# Altium PCB 按键.PcbDoc
Units mil, origin at the board's own origin, x right, y up, seen from the top; angles counter-clockwise.
Board outline 3931.98 x 2199.7 mil, 2 copper layers (Top Layer, Bottom Layer), stack 12.249 mil thick; 50 components, 31 nets, 116 pads, 466 vias.
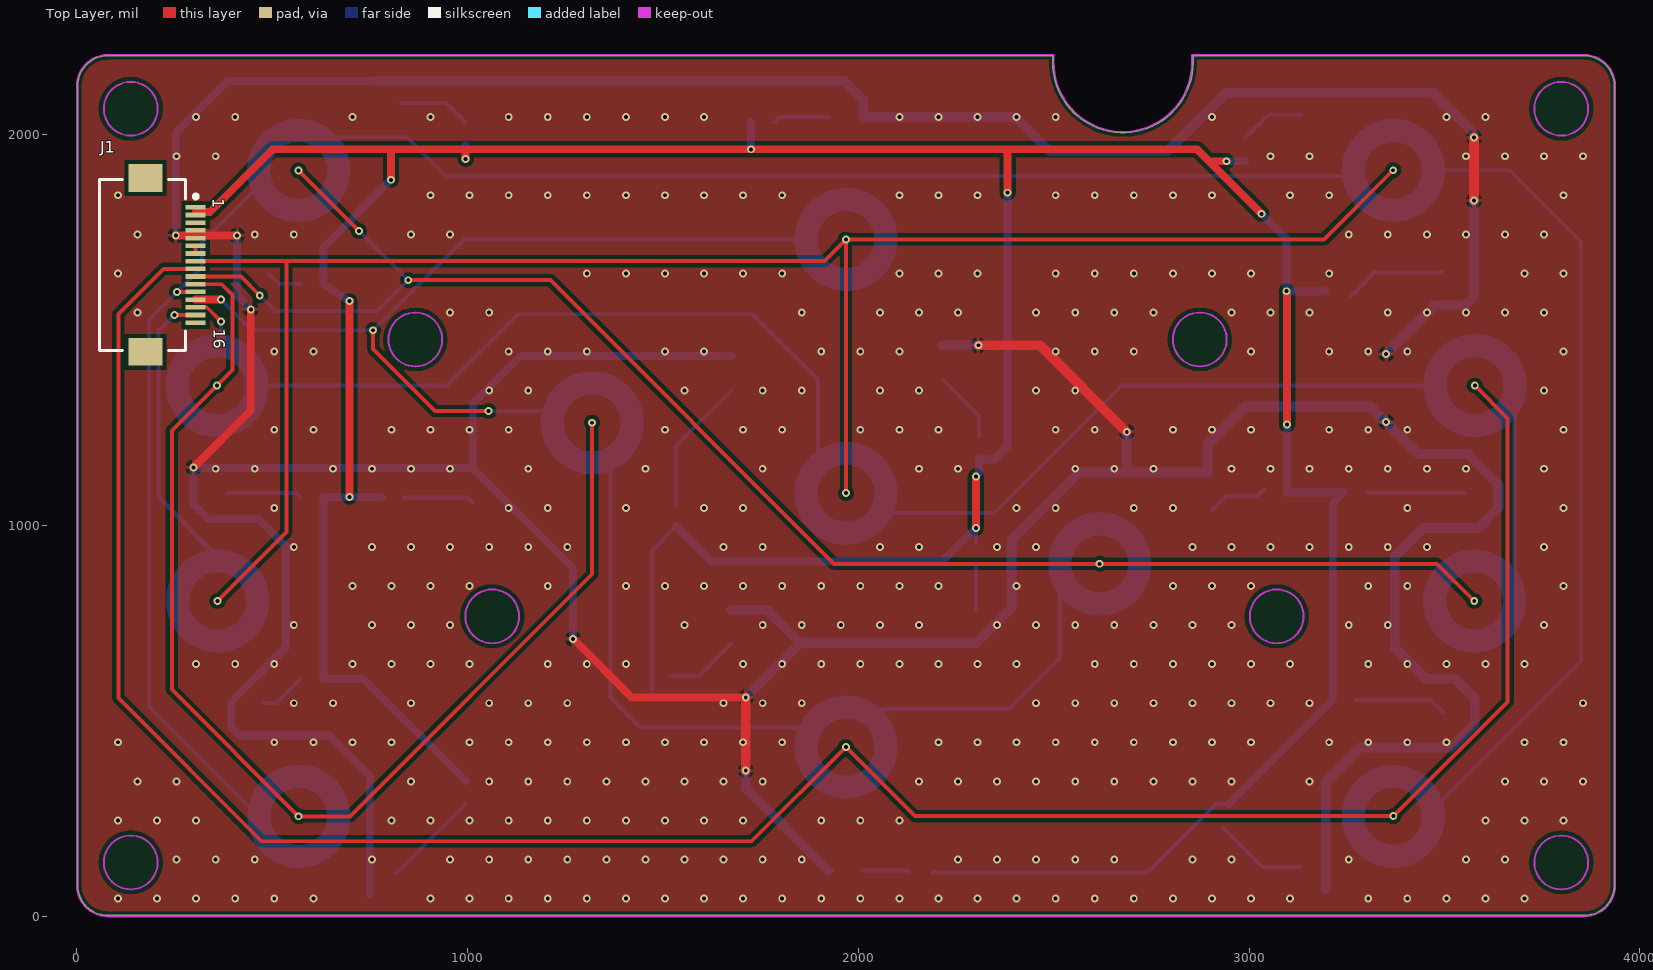
[diagram p0: Top Layer view]
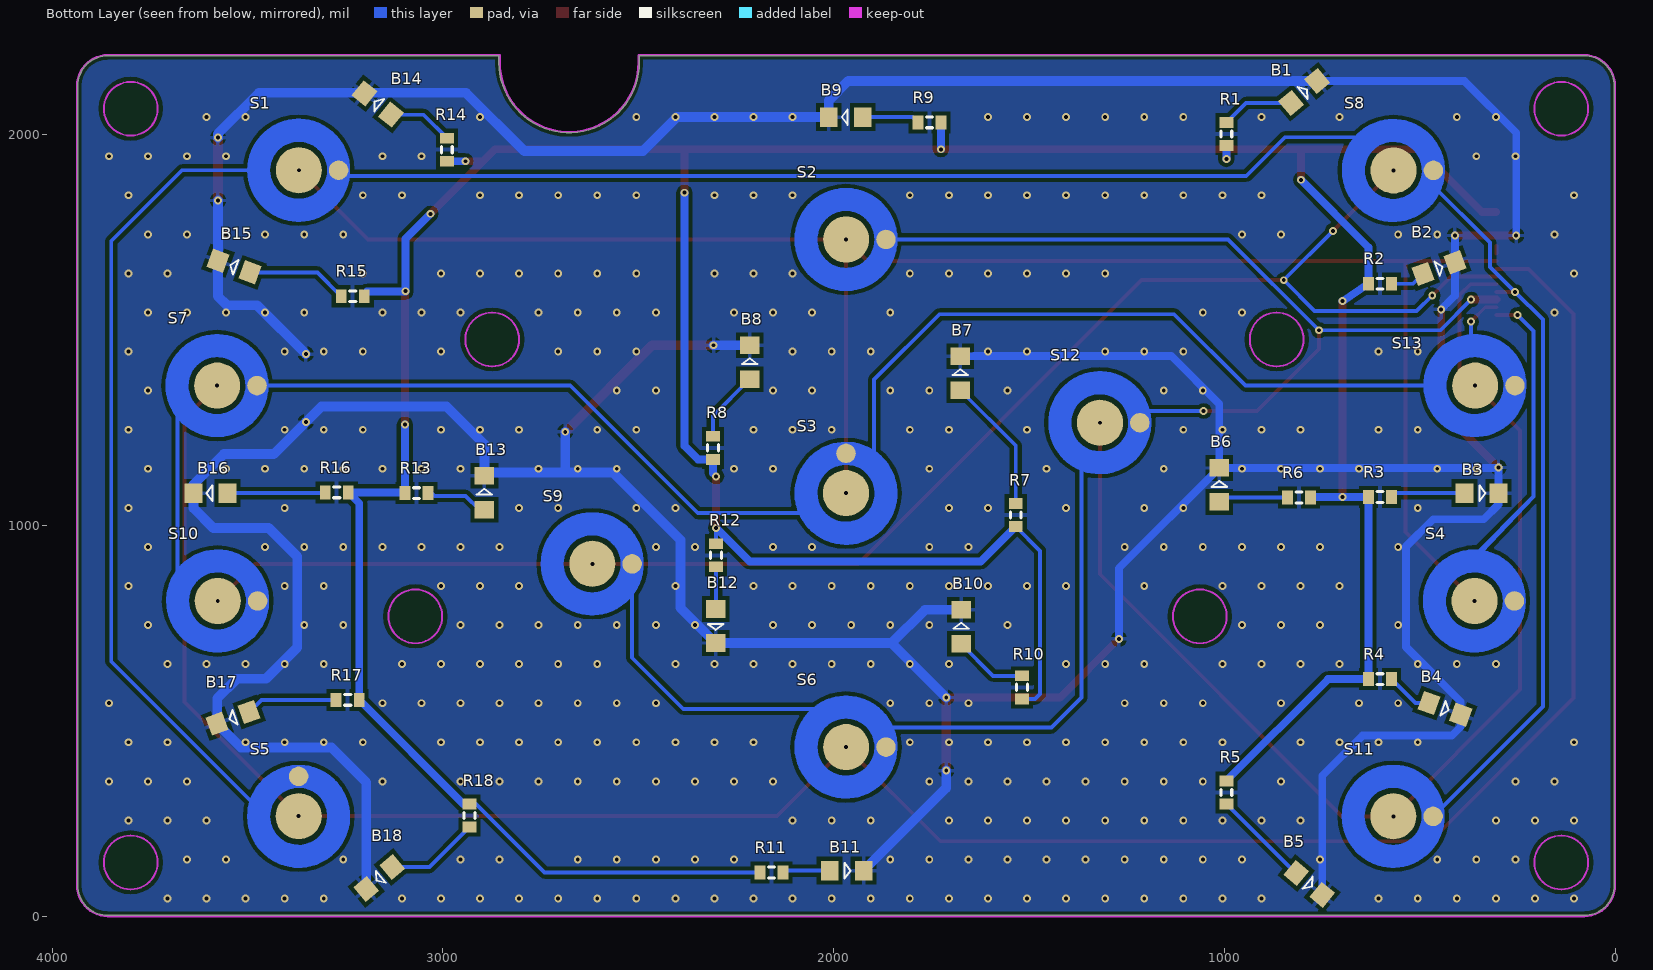
[diagram p1: Bottom Layer view, seen from below]
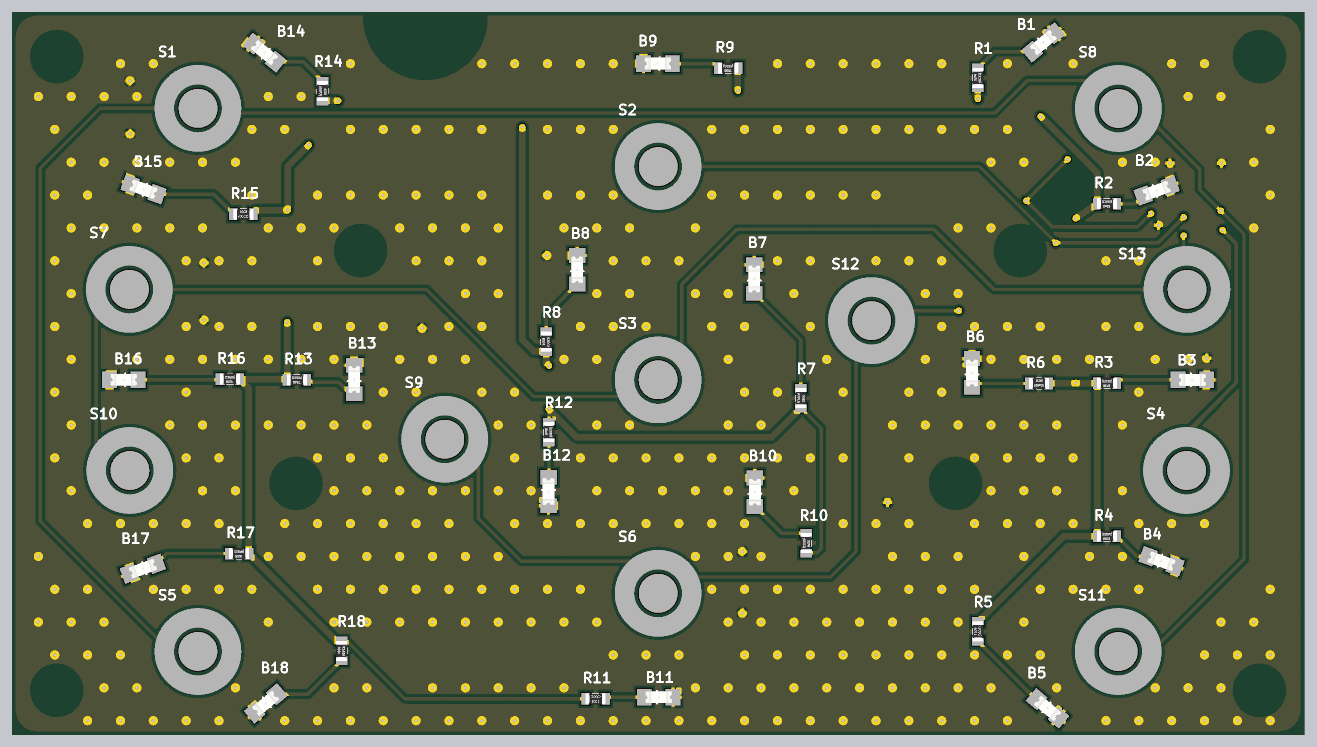
[diagram p2: 3D render of the assembled board from below, using the file's embedded part models]

## Layer stack, top to bottom
Top Layer: signal copper 1.4
Dielectric: core 9.4488, FR-4, Dk 4.8
Bottom Layer: signal copper 1.4

## Board outline
2.51,78.74 ccw(c78.74,78.74) 78.7,2.51 cw(c78.74,0) 78.74,2.52 3858.27,2.52 cw(c3858.27,0) 3858.31,2.51 ccw(c3858.27,78.74) 3934.5,78.68 cw(c3937.01,78.74) 3934.49,78.74 3934.49,2126.34 ccw(c3858.27,2125.99) 3858.31,2202.21 ccw(c3858.27,2125.99) 3858.27,2202.21 cw(c3858.27,2204.73) 3858.27,2202.21 ccw(c3858.27,2204.73) 3858.31,2202.21 3858.27,2202.21 2856.85,2202.21 2856.85,2185.04 cw(c2854.33,2185.04) 2856.85,2184.97 ccw(c2677.17,2185.04) 2856.85,2185.04 2856.85,2184.97 cw(c2677.17,2185.04) 2497.49,2185.02 cw(c2677.17,2185.04) 2497.49,2185.04 2497.49,2202.21 78.74,2202.21 ccw(c78.74,2204.73) 78.8,2202.21 78.74,2202.21 ccw(c78.74,2125.99) 2.51,2125.99 cw(c0,2125.99) 2.51,2125.92

## Design rules (kind name [scope] priority, off if disabled: settings)
Clearance [All] p1: gap=10
PolygonConnect [All] p1: connectstyle=Relief reliefconductorwidth=10 reliefentries=4 polygonreliefangle="90 Angle" airgapwidth=10
RoomDefinition 上海图客按键V5 [InComponentClass('上海图客按键V5')] p1: confinementstyle=ConfineIn formatcopy=TRUE lockcomponents=FALSE outline 3984.2,121 6990,121 6990,687.39 3984.2,687.39
RoutingVias [All] p1: holewidth=10 width=20 viastyle="Through Hole" minholewidth=10 minwidth=18 maxholewidth=28 maxwidth=50
SolderMaskExpansion [All] p1: expansion=4
Width [All] p1: maxlimit=100 minlimit=10 preferedwidth=20
28 further rules are at their usual default settings.

## Components (designator, comment, footprint, x,y, rotation, side; value= is the part's Value field where it differs from the comment)
B1 "GREEN" 0805LED 796,2110 r140 bottom
B2 "GREEN" 0805LED 451,1659 r160 bottom
B3 "GREEN" 0805LED 342,1083 r180 bottom
B4 "GREEN" 0805LED 436,531 r200 bottom
B5 "GREEN" 0805LED 783,83 r220 bottom
B6 "GREEN" 0805LED 1013,1104 r90 bottom
B7 "GREEN" 0805LED 1676,1390 r90 bottom
B8 "GREEN" 0805LED 2215,1418 r90 bottom
B9 "GREEN" 0805LED 1969.2,2045.61 r0 bottom
B10 "GREEN" 0805LED 1674,741 r90 bottom
B11 "GREEN" 0805LED 1967,117 r180 bottom
B12 "GREEN" 0805LED 2302,743 r270 bottom
B13 "GREEN" 0805LED 2894,1084 r90 bottom
B14 "GREEN" 0805LED 3167,2079 r39 bottom
B15 "GREEN" 0805LED 3535,1663 r20 bottom
B16 "GREEN" 0805LED 3595.13,1083.07 r0 bottom
B17 "GREEN" 0805LED 3537,508 r340 bottom
B18 "GREEN" 0805LED 3163,98 r320 bottom
J1 "1-1734592-6" FFC/SM0.5-2H16 240,1667 r270 top
R1 "1K" 1608[0603]R 995,2002 r90 bottom
R2 "1K" 1608[0603]R 602,1619 r0 bottom
R3 "1K" 1608[0603]R 602,1073 r0 bottom
R4 "1K" 1608[0603]R 602,607 r0 bottom
R5 "1K" 1608[0603]R 995,317 r90 bottom
R6 "1K" 1608[0603]R 809,1072 r180 bottom
R7 "1K" 1608[0603]R 1534,1027 r270 bottom
R8 "1K" 1608[0603]R 2309,1199 r90 bottom
R9 "1K" 1608[0603]R 1755,2032 r0 bottom
R10 "1K" 1608[0603]R 1518,586 r270 bottom
R11 "1K" 1608[0603]R 2159,112 r0 bottom
R12 "1K" 1608[0603]R 2301,924 r90 bottom
R13 "1K" 1608[0603]R 3068,1083 r0 bottom
R14 "1K" 1608[0603]R 2990,1962 r270 bottom
R15 "1K" 1608[0603]R 3231,1587 r180 bottom
R16 "1K" 1608[0603]R 3272,1085 r0 bottom
R17 "1K" 1608[0603]R 3244,554 r0 bottom
R18 "1K" 1608[0603]R 2932,258 r90 bottom
S1 "SW-PB" SSD#1 3369.34,1909.9 r180 bottom
S2 "SW-PB" SSD#1 1968.5,1732.73 r180 bottom
S3 "SW-PB" SSD#2 1968.95,1082.68 r90 bottom
S4 "SW-PB" SSD#3 360.14,807.53 r180 bottom
S5 "SW-PB" SSD#1 3369.79,255.91 r90 bottom
S6 "SW-PB" SSD#2 1968.5,433.52 r180 bottom
S7 "SW-PB" SSD#2 3578.34,1358.71 r180 bottom
S8 "SW-PB" SSD#2 567.45,1909.45 r180 bottom
S9 "SW-PB" SSD#1 2618.11,902.58 r180 bottom
S10 "SW-PB" SSD#3 3576.86,807.53 r180 bottom
S11 "SW-PB" SSD#1 568,256.35 r180 bottom
S12 "SW-PB" SSD#4 1318.9,1263.67 r180 bottom
S13 "SW-PB" SSD#4 358.67,1358.71 r180 bottom

## Footprints (in the part's own frame and the unit in brackets; to place one, negate y for a bottom-side part, rotate by r counter-clockwise, add the part's x,y. Pads: shape width x height; smd on the part's side, far side on the other; paste and mask are expansions set on the pad)
0805LED [mil]
  rect 45x50 smd: 1(-43.5,0) 2(43.5,0)
  silkscreen extent -5,-20 10,20, body extent -41,-18 41,18, height 33
1608[0603]R [mm] "Chip Resistor, Body 1.6x0.8mm, IPC Medium Density"
  rect 0.7x0.9 smd: 1(-0.75,0) 2(0.75,0)
  silkscreen extent -0.2,-0.35 0.2,0.35, body extent -0.77,-0.42 0.78,0.43, height 0.45
FFC/SM0.5-2H16 [mm]
  rect 0.3x1.3 smd: 1(-3.75,1.625) 2(-3.25,1.625) 3(-2.75,1.625) 4(-2.25,1.625) 5(-1.75,1.625) 6(-1.25,1.625) 7(-0.75,1.625) 8(-0.25,1.625) 9(0.25,1.625) 10(0.75,1.625) 11(1.25,1.625) 12(1.75,1.625) 13(2.25,1.625) 14(2.75,1.625) 15(3.25,1.625) 16(3.75,1.625)
  rect 1.8x2.2 smd: 17(-5.65,-1.625) 18(5.65,-1.625)
  silkscreen extent -5.55,-4.62 5.55,1.75, body extent -5.55,-4.62 5.55,0.97, height 2
SSD#1 [mm]
  round 3 smd: 1(0.01,-0.011)
  round 1.27 smd: 2(2.599,-0.011)
  Top Layer lines w1.5: 2.599,-0.011 cw(c-0.001,-0.011) -2.601,-0.011 cw(c-0.001,-0.011) 2.599,-0.011
SSD#2 [mm]
  round 3 smd: 1(0.01,-0.011)
  round 1.27 smd: 2(2.599,-0.011)
  Top Layer lines w1.5: 1.847,-1.84 cw(c-0.001,-0.011) -1.288,2.248 cw(c-0.001,-0.011) -0.001,2.589 cw(c-0.001,-0.011) 0.659,2.503 cw(c-0.001,-0.011) 1.847,-1.84
SSD#3 [mm]
  round 3 smd: 1(0.01,-0.011)
  round 1.27 smd: 2(2.599,-0.011)
  Top Layer lines w1.5: -0.134,2.585 ccw(c-0.001,-0.011) -0.364,2.563 ccw(c-0.001,-0.011) -2.601,-0.011 ccw(c-0.001,-0.011) -0.134,2.585
SSD#4 [mm]
  round 3 smd: 1(0.01,-0.011)
  round 1.27 smd: 2(2.599,-0.011)
  Top Layer lines w1.5: 2.565,0.411 ccw(c-0.001,-0.011) 2.485,0.752 ccw(c-0.001,-0.011) -2.601,-0.011 ccw(c-0.001,-0.011) -1.2,-2.318 ccw(c-0.001,-0.011) 2.007,-1.663 ccw(c-0.001,-0.011) 2.565,0.411

## Part data
B1 B2 B3 B4 B5 B6 B7 B8 B9 B10 B11 B12 B13 B14 B15 B16 B17 B18: library part LED, "发光管"
J1: library part 16PIN, "TE CONNECTIVITY / AMP - 1-1734592-6 - FFC/FPC CONNECTOR, RECEPTACLE 16POS 1ROW"
R1 R2 R3 R4 R5 R6 R7 R8 R9 R10 R11 R12 R13 R14 R15 R16 R17 R18: library part RES, "电阻"
S1 S2 S3 S4 S5 S6 S7 S8 S9 S10 S11 S12 S13: "Switch"

## Via types
v1: diameter 20, hole 10, Top Layer to Bottom Layer, 466 vias

## Nets (pads, with @x,y where several pads share a name; then routed paths per layer and width w, separated by ;. In a path a pad name is that pad's centre, name@x,y a point inside that pad or via, vN(x,y) a via of type N, cw(c..) or ccw(c..) an arc to the next point about the centre after c; other vN are vias at no path point)
EINT0/GPF0: J1.8 S1.1 S2.1 S3.1 S4.1 | length 4753.7
  Top Layer w10: J1.8 536,1676.84 ; v1(359.75,807.09) 536,983.34 536,1676.84 ; v1(1968.51,1083.07) v1@1968.51,1731.89 ; v1(3368.95,1909.45) 3191.78,1732.28 v1(1968.11,1732.28) v1@1968.51,1731.89 ; 536,1676.84 1913.46,1676.84 v1@1968.51,1731.89
EINT1/GPF1: J1.9 S5.1 S6.1 S7.1 | length 6075.1
  Top Layer w10: J1.9 221.16,1657.16 106,1542 106,559 473,192 1727.04,192 v1(1968.11,433.07) 2144.88,256.3 v1(3369.34,256.3) 3662,548.96 3662,1274.22 v1(3577.95,1358.27)
EINT2/GPF2: J1.10 S8.1 S9.1 S10.1 | length 4079.3
  Top Layer w10: J1.10 419.53,1637.47 v1(468,1589) ; v1(567.06,1909) v1(722.06,1754) ; v1(848,1628.06) 1211.94,1628.06 1937.87,902.13 v1(2617.72,902.13) 3481.43,902.13 v1(3576.47,807.09)
  Bottom Layer w10: v1(468,1589) 508,1549 768.94,1549 v1(848,1628.06) v1(722.06,1754)
EINT3/GPF3: J1.11 S11.1 S12.1 S13.1 | length 3033.5
  Top Layer w10: J1.11 370.21,1617.79 398,1590 398,1397.99 v1(358.27,1358.27) 243,1242.99 243,580.51 v1(567.61,255.9) 698.9,255.9 1318.51,875.51 v1(1318.51,1263.22)
EINT4/GPF4: J1.12 S1.2 S5.2 S8.2 S11.2 | length 8433.7
  Top Layer w10: v1(256.1,1598.1) J1.12
  Bottom Layer w10: S11.2 185,536.58 ; S11.2 185,536.58 ; 185,536.58 185,1527 v1(256.1,1598.1) 320,1662 320,1724.03 ; 320,1724.03 470.94,1874.97 320,1724.03 ; 845,1994 624.52,1994 845,1994 ; 845,1994 944,1895 S1.2@3252.56,1895 ; S1.2@3252.56,1895 S1.2 S1.2@3252.56,1895 ; 3471.74,1909.45 3667.55,1909.45 ; 3471.74,1909.45 3667.55,1909.45 ; 3471.74,1909.45 3667.55,1909.45 ; 3667.55,1909.45 3849,1728 3849,652.19 ; 3849,652.19 3470.2,273.39 3849,652.19
EINT5/GPF5: J1.13 S2.2 S6.2 S9.2 S12.2 | length 4237.2
  Top Layer w10: v1(758,1500) 758,1452 916.72,1293.28 v1(1053.28,1293.28)
  Top Layer w20: J1.13 v1(368.58,1578.42)
  Bottom Layer w10: v1(368.58,1578.42) 447,1500 v1(758,1500) 990.28,1732.28 S2.2 ; v1(1053.28,1293.28) 1221.08,1293.28 ; 1366.14,1172.39 1366.14,559.86 1443,483 1879.18,483 ; 1998.25,531.03 2385.03,531.03 2515.78,661.78 S9.2
EINT6/GPF6: J1.14 S3.2 S7.2 S10.2 S13.2 | length 4415.5
  Top Layer w10: J1.14 332.27,1558.73 v1(369,1522)
  Bottom Layer w10: 353.27,1472.47 339.64,1458.84 379.03,1453.33 ; v1(369,1522) 369,1464.95 ; 404.63,1449.75 379.03,1453.33 ; 1896.49,1155.39 1896.49,1373.51 1729,1541 1129,1541 946.27,1358.27 461.06,1358.27 379.03,1453.33 ; 2057.44,1031.97 2347.97,1031.97 2674.27,1358.27 S7.2 3500.79,1291.49 ; 3656.81,871.06 3679.2,810.73 ; 3679.26,807.09 3679.2,810.73 ; 3680.74,1358.27 3679.2,1356.73 3679.2,1340.57 3679.2,810.73 ; 369,1464.95 364.51,1460.47 369,1464.95 ; 369,1464.95 373.68,1459.53 379.03,1453.33
EINT7/GPF7: J1.15 S4.2 | length 1231.2
  Top Layer w10: v1(250.05,1539.05) J1.15
  Bottom Layer w10: v1(250.05,1539.05) 209,1498 209,1073.93 ; 365.41,909.32 209,1073.93 ; 209,1073.93 374.49,908.44 209,1073.93
LGND: B1.2 B2.2 B3.2 B4.2 B5.2 B6.2 B7.2 B8.2 B9.2 B10.2 B11.2 B12.2 B13.2 B14.2 B15.2 B16.2 B17.2 B18.2 J1.4 J1.5 | length 15144
  Top Layer w20: v1(253.2,1742.39) v1(410.12,1742.39) ; v1(298.5,1148.69) 445.2,1295.39 v1(445.2,1553.39) ; v1(1270,710) 1420,560 v1(1712,560)
  Top Layer w25: v1(1712,373) v1(1712,560) ; v1(2307.5,1461.5) 2465.5,1461.5 v1(2687,1240) ; v1(3576,1832) v1(3576,1993)
  Bottom Layer w20: v1(253.2,1742.39) 253.2,2005.39 385.77,2137.96 B1.2 ; v1(410.12,1742.39) B2.2 410.12,1588.47 v1(445.2,1553.39) ; B5.2 749.67,359.33 646.61,462.39 418.12,462.39 395.12,485.39 B4.2 395.12,549.32 535,689.2 535,946.59 465.2,1016.39 336.2,1016.39 298.5,1054.09 B3.2 v1(298.5,1148.69) 299.69,1147.5 B6.2 ; v1(1270,710) 1270,890.5 B6.2 ; B7.2 1642.2,1433.5 1641.31,1434.39 1136.2,1434.39 1013,1311.2 B6.2
  Bottom Layer w25: B1.2 818.65,2137.96 818.84,2138.15 843.03,2138.15 843.21,2137.96 1963.04,2137.96 2012.7,2088.3 B9.2 2401.39,2045.61 2488,1959 2792,1959 2940.71,2107.71 3471.29,2107.71 3576,2003 v1(3576,1993) ; B10.2 1766.49,784.5 1851.5,699.5 ; v1(1712,373) 1712,328.5 B11.2 ; v1(1712,560) 1851.5,699.5 ; B8.2 v1(2307.5,1461.5) ; v1(2687,1240) 2687,1138 2685,1136 ; B18.2 3196.33,342.67 3285.65,432 3516.76,432 B17.2 3577.88,557.12 3527,608 3453,608 3373,688 3373,921 3446,994 3588,994 3638.63,1044.63 B16.2 3638.63,1105.37 3561,1183 3433,1183 v1(3351,1265) 3311,1305 2991,1305 2894,1208 2894,1136 2685,1136 ; v1(3351,1439) 3476,1564 3553,1564 3575.88,1586.88 B15.2 3576,1678 v1(3576,1832) ; 1851.5,699.5 B12.2 2392,789.5 2392,963 2565,1136 2685,1136
  other v1: 105.2,45.39 205.2,45.39 305.2,45.39 405.2,45.39 505.2,45.39 605.2,45.39 905.2,45.39 1005.2,45.39 1105.2,45.39 1205.2,45.39 1305.2,45.39 1405.2,45.39 1505.2,45.39 1605.2,45.39 1705.2,45.39 1805.2,45.39 1905.2,45.39 2005.2,45.39 2105.2,45.39 2205.2,45.39 2305.2,45.39 2405.2,45.39 2505.2,45.39 2605.2,45.39 2705.2,45.39 2805.2,45.39 2905.2,45.39 3005.2,45.39 3105.2,45.39 3305.2,45.39 3405.2,45.39 3505.2,45.39 3605.2,45.39 3705.2,45.39 255.2,145.39 355.2,145.39 455.2,145.39 755.2,145.39 955.2,145.39 1055.2,145.39 1155.2,145.39 1255.2,145.39 1355.2,145.39 1455.2,145.39 1555.2,145.39 1655.2,145.39 1755.2,145.39 1855.2,145.39 2255.2,145.39 2355.2,145.39 2455.2,145.39 2555.2,145.39 2655.2,145.39 2855.2,145.39 2955.2,145.39 3255.2,145.39 3555.2,145.39 3655.2,145.39 105.2,245.39 205.2,245.39 305.2,245.39 805.2,245.39 905.2,245.39 1005.2,245.39 1105.2,245.39 1205.2,245.39 1305.2,245.39 1405.2,245.39 1505.2,245.39 1605.2,245.39 1705.2,245.39 1905.2,245.39 2005.2,245.39 2105.2,245.39 3605.2,245.39 3705.2,245.39 3805.2,245.39 155.2,345.39 255.2,345.39 855.2,345.39 1055.2,345.39 1155.2,345.39 1255.2,345.39 1355.2,345.39 1455.2,345.39 1555.2,345.39 1655.2,345.39 1755.2,345.39 2155.2,345.39 2255.2,345.39 2355.2,345.39 2455.2,345.39 2555.2,345.39 2655.2,345.39 2755.2,345.39 2855.2,345.39 2955.2,345.39 3155.2,345.39 3655.2,345.39 3755.2,345.39 3855.2,345.39 105.2,445.39 505.2,445.39 605.2,445.39 705.2,445.39 805.2,445.39 1005.2,445.39 1105.2,445.39 1205.2,445.39 1305.2,445.39 1405.2,445.39 1505.2,445.39 1605.2,445.39 1705.2,445.39 1805.2,445.39 2205.2,445.39 2305.2,445.39 2405.2,445.39 2505.2,445.39 2605.2,445.39 2705.2,445.39 2805.2,445.39 2905.2,445.39 3005.2,445.39 3205.2,445.39 3305.2,445.39 3405.2,445.39 3505.2,445.39 3705.2,445.39 3805.2,445.39 555.2,545.39 655.2,545.39 855.2,545.39 1055.2,545.39 1155.2,545.39 1255.2,545.39 1655.2,545.39 1755.2,545.39 1855.2,545.39 2455.2,545.39 2555.2,545.39 2655.2,545.39 2755.2,545.39 2855.2,545.39 2955.2,545.39 3055.2,545.39 3155.2,545.39 3855.2,545.39 305.2,645.39 405.2,645.39 505.2,645.39 705.2,645.39 805.2,645.39 905.2,645.39 1005.2,645.39 1205.2,645.39 1305.2,645.39 1405.2,645.39 1705.2,645.39 1805.2,645.39 1905.2,645.39 2005.2,645.39 2105.2,645.39 2205.2,645.39 2305.2,645.39 2405.2,645.39 2605.2,645.39 2705.2,645.39 2805.2,645.39 2905.2,645.39 3005.2,645.39 3105.2,645.39 3305.2,645.39 3405.2,645.39 3505.2,645.39 3605.2,645.39 3705.2,645.39 555.2,745.39 755.2,745.39 855.2,745.39 955.2,745.39 1555.2,745.39 1755.2,745.39 1855.2,745.39 1955.2,745.39 2055.2,745.39 2155.2,745.39 2355.2,745.39 2455.2,745.39 2555.2,745.39 2655.2,745.39 2755.2,745.39 2855.2,745.39 2955.2,745.39 3255.2,745.39 3355.2,745.39 3755.2,745.39 705.2,845.39 805.2,845.39 905.2,845.39 1005.2,845.39 1205.2,845.39 1405.2,845.39 1505.2,845.39 1605.2,845.39 1705.2,845.39 1805.2,845.39 1905.2,845.39 2005.2,845.39 2105.2,845.39 2205.2,845.39 2405.2,845.39 2805.2,845.39 2905.2,845.39 3005.2,845.39 3305.2,845.39 3405.2,845.39 3805.2,845.39 555.2,945.39 755.2,945.39 855.2,945.39 955.2,945.39 1055.2,945.39 1155.2,945.39 1255.2,945.39 1655.2,945.39 1755.2,945.39 2055.2,945.39 2155.2,945.39 2355.2,945.39 2455.2,945.39 2855.2,945.39 2955.2,945.39 3055.2,945.39 3155.2,945.39 3255.2,945.39 3355.2,945.39 3455.2,945.39 3755.2,945.39 505.2,1045.39 1105.2,1045.39 1205.2,1045.39 1405.2,1045.39 1605.2,1045.39 1705.2,1045.39 2405.2,1045.39 2505.2,1045.39 2705.2,1045.39 2805.2,1045.39 3405.2,1045.39 3805.2,1045.39 355.2,1145.39 455.2,1145.39 655.2,1145.39 755.2,1145.39 855.2,1145.39 955.2,1145.39 1155.2,1145.39 1455.2,1145.39 1755.2,1145.39 2155.2,1145.39 2255.2,1145.39 2555.2,1145.39 2655.2,1145.39 2755.2,1145.39 2955.2,1145.39 3055.2,1145.39 3155.2,1145.39 3255.2,1145.39 3355.2,1145.39 3455.2,1145.39 3555.2,1145.39 3755.2,1145.39 505.2,1245.39 605.2,1245.39 805.2,1245.39 905.2,1245.39 1005.2,1245.39 1105.2,1245.39 1505.2,1245.39 1705.2,1245.39 1805.2,1245.39 2005.2,1245.39 2105.2,1245.39 2205.2,1245.39 2505.2,1245.39 2605.2,1245.39 2805.2,1245.39 2905.2,1245.39 3005.2,1245.39 3205.2,1245.39 3305.2,1245.39 3405.2,1245.39 3805.2,1245.39 1055.2,1345.39 1155.2,1345.39 1555.2,1345.39 1755.2,1345.39 1855.2,1345.39 2055.2,1345.39 2155.2,1345.39 2455.2,1345.39 2555.2,1345.39 3755.2,1345.39 505.2,1445.39 605.2,1445.39 1105.2,1445.39 1205.2,1445.39 1305.2,1445.39 1505.2,1445.39 1605.2,1445.39 1905.2,1445.39 2005.2,1445.39 2105.2,1445.39 2505.2,1445.39 2605.2,1445.39 2705.2,1445.39 3005.2,1445.39 3205.2,1445.39 3305.2,1445.39 3405.2,1445.39 3805.2,1445.39 155.2,1545.39 955.2,1545.39 1055.2,1545.39 1855.2,1545.39 2055.2,1545.39 2155.2,1545.39 2255.2,1545.39 2455.2,1545.39 2555.2,1545.39 2655.2,1545.39 2755.2,1545.39 2955.2,1545.39 3055.2,1545.39 3155.2,1545.39 3355.2,1545.39 3455.2,1545.39 3555.2,1545.39 3655.2,1545.39 3755.2,1545.39 105.2,1645.39 1305.2,1645.39 1405.2,1645.39 1505.2,1645.39 1605.2,1645.39 1705.2,1645.39 1805.2,1645.39 2105.2,1645.39 2205.2,1645.39 2305.2,1645.39 2505.2,1645.39 2605.2,1645.39 2705.2,1645.39 2805.2,1645.39 2905.2,1645.39 3005.2,1645.39 3205.2,1645.39 3705.2,1645.39 3805.2,1645.39 155.2,1745.39 455.2,1745.39 555.2,1745.39 855.2,1745.39 955.2,1745.39 3255.2,1745.39 3355.2,1745.39 3455.2,1745.39 3555.2,1745.39 3655.2,1745.39 3755.2,1745.39 105.2,1845.39 905.2,1845.39 1005.2,1845.39 1105.2,1845.39 1205.2,1845.39 1305.2,1845.39 1405.2,1845.39 1505.2,1845.39 1605.2,1845.39 1705.2,1845.39 1805.2,1845.39 2105.2,1845.39 2205.2,1845.39 2305.2,1845.39 2505.2,1845.39 2605.2,1845.39 2705.2,1845.39 2805.2,1845.39 2905.2,1845.39 3105.2,1845.39 3205.2,1845.39 3805.2,1845.39 255.2,1945.39 355.2,1945.39 3055.2,1945.39 3155.2,1945.39 3555.2,1945.39 3655.2,1945.39 3755.2,1945.39 3855.2,1945.39 305.2,2045.39 405.2,2045.39 705.2,2045.39 905.2,2045.39 1105.2,2045.39 1205.2,2045.39 1305.2,2045.39 1405.2,2045.39 1505.2,2045.39 1605.2,2045.39 2105.2,2045.39 2205.2,2045.39 2305.2,2045.39 2405.2,2045.39 2505.2,2045.39 2905.2,2045.39 3505.2,2045.39 3605.2,2045.39
NetB1_1: B1.1 R1.2 | length 186.6
  Bottom Layer w10: B1.1 944.49,2082.04 R1.2
NetB2_1: B2.1 R2.1 | length 91
  Bottom Layer w10: B2.1 517,1619 R2.1
NetB3_1: B3.1 R3.1 | length 191.1
  Bottom Layer w10: B3.1 562.47,1083 R3.1
NetB4_1: B4.1 R4.1 | length 120.9
  Bottom Layer w10: B4.1 511.35,545.88 R4.1
NetB5_1: B5.1 R5.1 | length 251.8
  Bottom Layer w10: B5.1 818.49,110.96 R5.1
NetB6_1: B6.1 R6.1 | length 179.2
  Bottom Layer w10: R6.1 1001.5,1072 B6.1
NetB7_1: B7.1 R7.1 | length 348.8
  Bottom Layer w10: R7.1 1534,1204.5 B7.1
NetB8_1: B8.1 R8.2 | length 184.9
  Bottom Layer w10: B8.1 2309,1280.49 R8.2
NetB9_1: B9.1 R9.2 | length 146.8
  Bottom Layer w10: R9.2 1798.13,2045.61 B9.1
NetB10_1: B10.1 R10.1 | length 190
  Bottom Layer w10: R10.1 1592.03,615.53 B10.1
NetB11_1: B11.1 R11.1 | length 121
  Bottom Layer w10: B11.1 2124.47,117 R11.1
NetB12_1: B12.1 R12.1 | length 108.4
  Bottom Layer w10: R12.1 2301,787.5 B12.1
NetB13_1: B13.1 R13.1 | length 178.5
  Bottom Layer w10: B13.1@2906,1040 2942,1076 3021.47,1076 ; 3021.47,1076 3038.47,1093 3033.47,1088 3021.47,1076
NetB14_1: B14.1 R14.1 | length 168.1
  Bottom Layer w10: R14.1 3050.09,2051.62 B14.1
NetB15_1: B15.1 R15.1 | length 258.9
  Bottom Layer w10: R15.1 3321.65,1648.12 B15.1
NetB16_1: B16.1 R16.2 | length 250.9
  Bottom Layer w10: R16.2 3303.46,1083.07 B16.1
NetB17_1: B17.1 R17.2 | length 235.5
  Bottom Layer w10: R17.2 3465,554 B17.1
NetB18_1: B18.1 R18.1 | length 240.1
  Bottom Layer w10: R18.1 3034.51,125.96 B18.1
UGND: J1.6 J1.7 | length 19.7
  Top Layer w10: J1.7 J1.6
USB1_N: J1.16
USB1_P: J1.3
VCC: J1.1 J1.2 R1.1 R2.2 R3.2 R4.2 R5.2 R6.2 R7.2 R8.1 R9.1 R10.2 R11.2 R12.2 R13.2 R14.2 R15.2 R16.1 R17.1 R18.2 | length 10307.8
  Top Layer w20: 304,1803 341,1803 501,1963 799,1963 ; v1(697.53,1073.53) v1(697.53,1574.47) ; v1(804,1885) 804,1958 799,1963 ; v1(995,1938) 995,1963 ; v1(2301,994) v1(2301,1126) ; v1(2382,1852) 2382,1963 ; v1(2942.47,1932.47) 2897.53,1932.47 ; v1(3032,1798) 2897.53,1932.47 ; v1(3097.53,1258.47) v1@3097.53,1592.53 ; 799,1963 995,1963 ; 995,1963 v1(1725.47,1963) 2382,1963 ; 2382,1963 2867,1963 2897.53,1932.47
  Bottom Layer w10: R10.2 1484.53,556.47 1472,569 1472,935.47 R7.2 ; R11.2 2740,112 2915.53,287.53 R18.2 R18.2@2948,287.53 ; R12.2 v1(2301,994) ; v1(2301,1126) 2309,1134
  Bottom Layer w20: v1(697.53,1574.47) R2.2 631.53,1712.53 v1(804,1885) ; R6.2 778.47,1073 R3.2 R4.2 734.53,607 R5.2 ; v1(995,1938) R1.1 ; R7.2 1623.47,908 2215,908 v1(2301,994) ; v1(1725.47,1963) R9.1 ; 2309,1134 R8.1 2347.47,1169.47 2382,1204 v1(2382,1852) ; v1(2942.47,1932.47) R14.2 ; R18.2@2948,287.53 R17.1 3214.47,1057 R16.1 3099.53,1085 R13.2 v1(3097.53,1258.47) ; v1(3032,1798) 3096,1734 v1(3096,1600) ; v1@3096.06,1599 R15.2@3194.47,1599
pads on no net: J1.17 J1.18

## Polygon pours and split planes (outlines as drawn)
LGND on Bottom Layer "Bottom Layer-LGND" (solid, remove dead copper, pour order 2): -133,2268 -126,2261 -126,-37 3987,-37 4015,-65 4015,2268
LGND on Top Layer "Top Layer-LGND" (solid, remove dead copper, pour order 2): -133,2268 -126,2261 -126,-37 3987,-37 4015,-65 4015,2268

## Keep-outs
Keep-Out Layer:
  circle w5: c137.8,137.8 r68.9
  circle w5: c1062.99,767.72 r68.9
  circle w5: c137.8,2066.93 r68.9
  circle w5: c866.14,1476.38 r68.9
  circle w5: c3070.87,767.72 r68.9
  circle w5: c3799.21,137.8 r68.9
  circle w5: c2874.02,1476.38 r68.9
  circle w5: c3799.21,2066.93 r68.9
  lines w5: 3937.01,2125.99 ccw(c3858.27,2125.99) 3858.27,2204.73 2854.33,2204.73 2854.33,2185.04 cw(c2677.17,2185.04) 2500,2185.04 2500,2204.73 78.74,2204.73 ccw(c78.74,2125.99) 0,2125.99 0,78.74 ccw(c78.74,78.74) 78.74,0 3858.27,0 ccw(c3858.27,78.74) 3937.01,78.74 3937.01,2129.99
PCB Boundary 1:
  circle w5: c1062.99,767.72 r68.9
  circle w5: c866.14,1476.38 r68.9
  circle w5: c3070.87,767.72 r68.9
  circle w5: c2874.02,1476.38 r68.9

## Other copper
Top Layer:
  text ".Legend" at 4094,23 h60

## Silkscreen, mask and mechanical layers (free items; w line width, h text height)
PCB Boundary 1:
  circle w5: c137.8,137.8 r68.9
  circle w5: c137.8,2066.93 r68.9
  circle w5: c3799.22,137.8 r68.9
  circle w5: c3799.22,2066.93 r68.9
  lines w5: 3937.01,2125.99 ccw(c3858.27,2125.99) 3858.27,2204.73 2854.33,2204.73 2854.33,2185.04 cw(c2677.17,2185.04) 2500,2185.04 2500,2204.73 78.74,2204.73 ccw(c78.74,2125.99) 0,2125.99 0,78.74 ccw(c78.74,78.74) 78.74,0 3858.27,0 ccw(c3858.27,78.74) 3937.01,78.74 3937.01,2129.99
Mechanical 5:
  circle w5: c567.67,255.91 r177.17
  circle w5: c567.83,1909.45 r177.17
  circle w5: c1318.9,1263.22 r216.54
  circle w5: c360.14,807.09 r177.17
  circle w5: c358.67,1358.27 r177.17
  circle w5: c1968.51,1082.68 r275.59
  circle w5: c2618.11,902.13 r216.54
  circle w5: c1968.51,433.07 r216.54
  circle w5: c3369.34,255.91 r177.17
  circle w5: c3576.87,807.09 r177.17
  circle w5: c1968.51,1732.28 r216.54
  circle w5: c3369.34,1909.45 r177.17
  circle w5: c3578.34,1358.27 r177.17
  circle w10: c1968.5,1083.07 r1626.62
  lines w10: 1968.51,-165.5 1968.5,2331

## Text inside footprints (layer, text, board x,y; h text height)
J1: Top Overlay "1" at 347.85,1837.45 h30 r270; Top Overlay "16" at 349.85,1503.45 h30 r270